# Altium PCB Cubit3_main_pcb.PcbDoc (part 2 of 4)
Units mm, origin at the board's own origin, x right, y up, seen from the top; angles counter-clockwise.
Board outline 58.47 x 70 mm, 4 copper layers (Top Layer, Layer 2, Layer 3, Bottom Layer), stack 0.602 mm thick; 134 components, 100 nets, 451 pads, 313 vias.
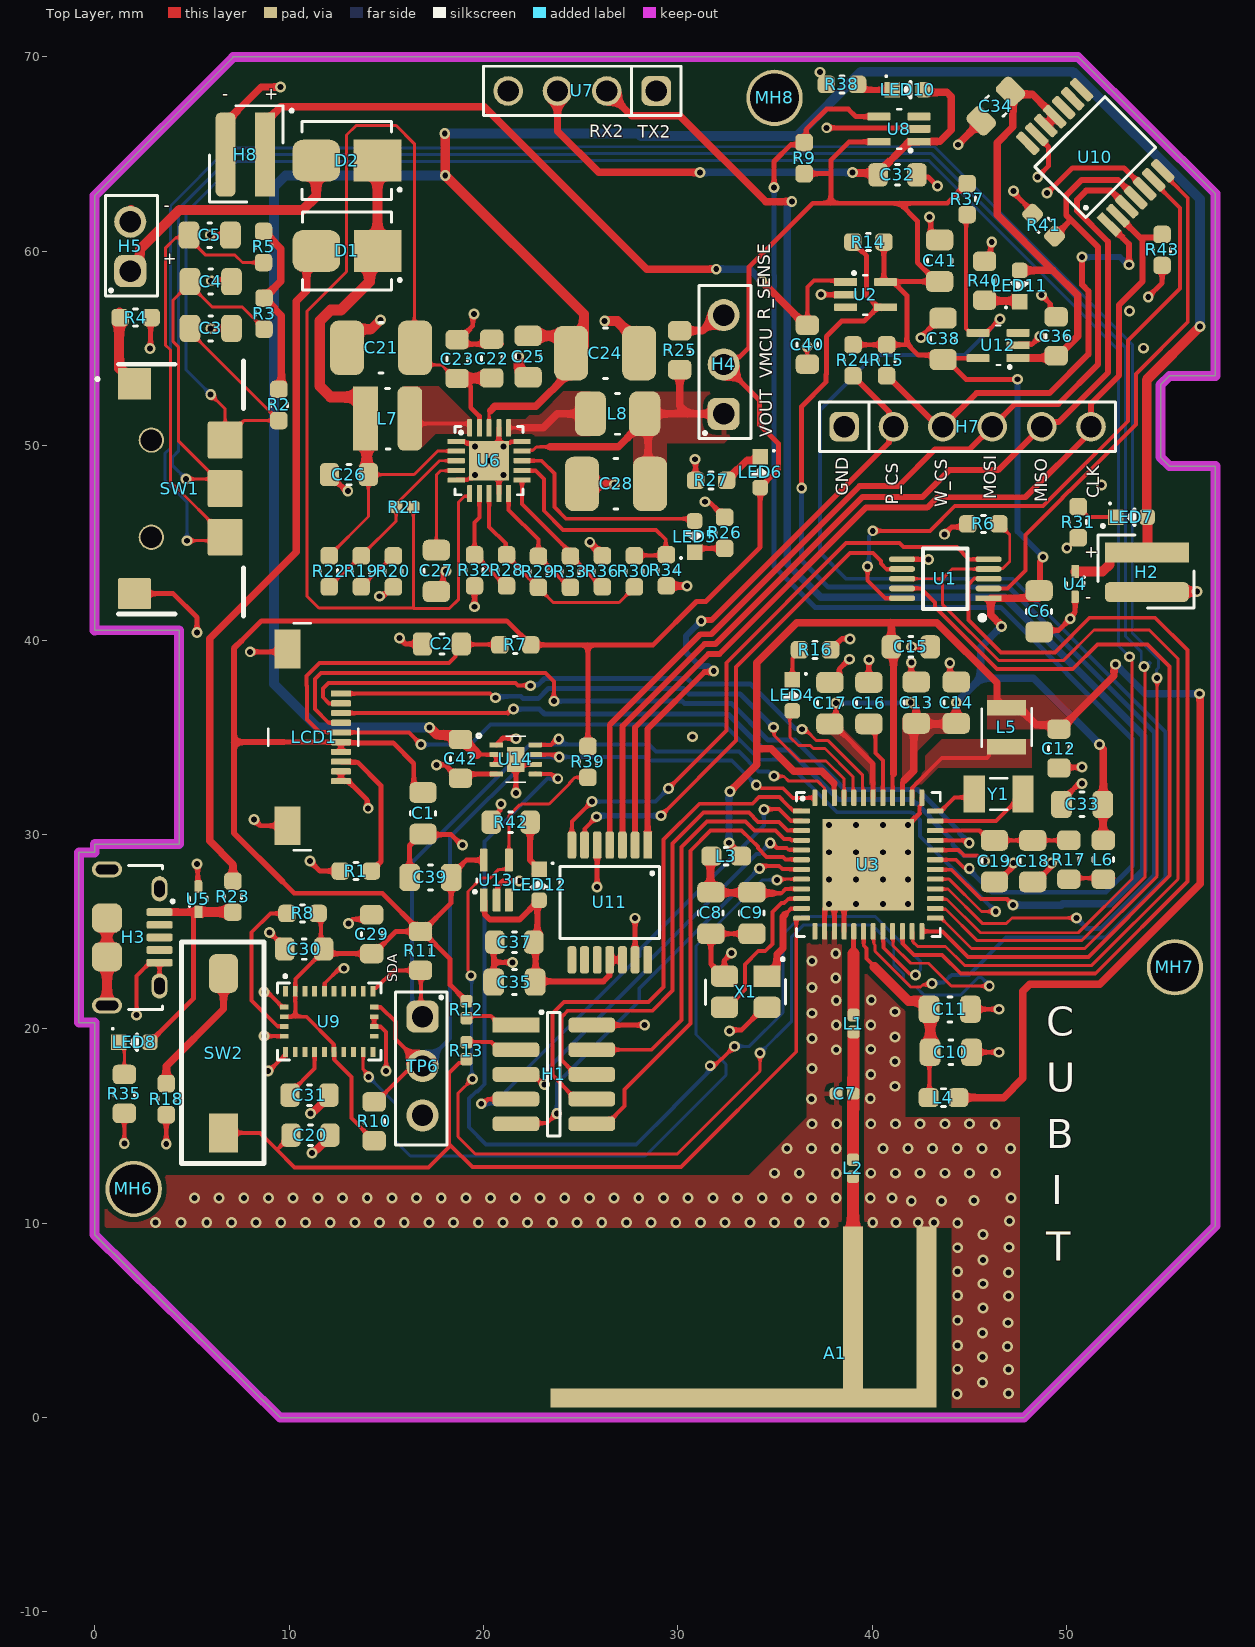
[diagram p0: Top Layer view]

## Part data (continued)
L5: library part DFE252012P-4R7M=P2, "4.7uH, 20%, 1 Element, Metal Alloy-Core, SMD, 1008", DC Resistance (DCR)=200mR, Inductance-Nom (L)=4.7uH, Inductor Type="GENERAL PURPOSE INDUCTOR", Manufacturer=Murata, Manufacturer Part Number=DFE252012P-4R7M=P2, Max Operating Temperature=125°C, Min Operating Temperature=-40°C, Rated Current-Max=1.4A, Test Frequency=1MHz, Tolerance=20%, Category="Fixed Inductors", ComponentLink1Description=https://psearch.en.murata.com:443/inductor/product/DFE252012P-4R7M_.pdf?src-supplier=IHS+Markit, ComponentLink1URL=https://psearch.en.murata.com:443/inductor/product/DFE252012P-4R7M_.pdf?src-supplier=IHS+Markit, ComponentLink2Description=http://www.farnell.com/datasheets/2550138.pdf?src-supplier=Farnell, ComponentLink2URL=http://www.farnell.com/datasheets/2550138.pdf?src-supplier=Farnell, ComponentLink3Description=http://www.murata.com/~/media/webrenewal/products/inductor/chip/tokoproducts/wirewoundmetalalloychiptype/m_dfe252012p.ashx?src-supplier=Digikey, ComponentLink3URL=http://www.murata.com/~/media/webrenewal/products/inductor/chip/tokoproducts/wirewoundmetalalloychiptype/m_dfe252012p.ashx?src-supplier=Digikey, ComponentLink4Description=https://www.murata.com/~/media/webrenewal/products/inductor/chip/tokoproducts/wirewoundmetalalloychiptype/m_dfe252012p.ashx?src-supplier=Digikey, ComponentLink4URL=https://www.murata.com/~/media/webrenewal/products/inductor/chip/tokoproducts/wirewoundmetalalloychiptype/m_dfe252012p.ashx?src-supplier=Digikey, ComponentLink5Description=http://www.toko.co.jp/products/pdf/inductors/dfe252012p.pdf?src-supplier=Avnet, ComponentLink5URL=http://www.toko.co.jp/products/pdf/inductors/dfe252012p.pdf?src-supplier=Avnet, ComponentLink6Description=http://www.farnell.com/datasheets/2550138.pdf?src-supplier=Newark, ComponentLink6URL=http://www.farnell.com/datasheets/2550138.pdf?src-supplier=Newark, Core Material=Metal, Number of Functions=1, Number of Pins=2, Pricing 1="1=0.28, 10=0.228, 25=0.21, 50=0.1926, 100=0.1698, 250=0.1646, 500=0.14708, 1000=0.11907 (USD)", Reach SVHC Compliant=Yes, RoHS=Yes, RoHS Compliant=Yes, Shape/Size Description="RECTANGULAR PACKAGE", Shielding=Shielded, Stock 1=44321, Supplier 1=Digikey, Surface Mount=Yes, Terminal Placement="Dual Ended", Termination=Wraparound
L6: library part 74279266, "Ferrite Beads WE-CBF 0603 SMD Bead 100MHz 1000Ohm 200mA", Case Code (Imperial)=0603, Case Code (Metric)=1608, Case/Package=SMD/SMT, Current Rating=200mA, DC Resistance (DCR)=600mR, Inductance=1.8nH, Manufacturer="Wurth Electronics", Max Operating Temperature=125°C, Min Operating Temperature=-55°C, Test Frequency=100MHz, Tolerance=25%, Category="Ferrite Beads and Chips", ComponentLink1Description=https://datasheet.ciiva.com/23763/74279266-23763009.pdf?src-supplier=Newark, ComponentLink1URL=https://datasheet.ciiva.com/23763/74279266-23763009.pdf?src-supplier=Newark, ComponentLink2Description=https://datasheet.ciiva.com/11799/0900766b801ef1d0-11799352.pdf?src-supplier=RSComponents, ComponentLink2URL=https://datasheet.ciiva.com/11799/0900766b801ef1d0-11799352.pdf?src-supplier=RSComponents, ComponentLink3Description=https://datasheet.ciiva.com/12395/74279266-221135-12395453.pdf?src-supplier=Mouser, ComponentLink3URL=https://datasheet.ciiva.com/12395/74279266-221135-12395453.pdf?src-supplier=Mouser, ComponentLink4Description=https://datasheet.ciiva.com/14971/74279266-14971192.pdf?src-supplier=Digi-Key, ComponentLink4URL=https://datasheet.ciiva.com/14971/74279266-14971192.pdf?src-supplier=Digi-Key, ComponentLink5Description=https://datasheet.ciiva.com/14634/0900766b801ef1d0-14634816.pdf?src-supplier=Allied+Electronics, ComponentLink5URL=https://datasheet.ciiva.com/14634/0900766b801ef1d0-14634816.pdf?src-supplier=Allied+Electronics, ComponentLink6Description=https://datasheet.ciiva.com/1466/1705901-1466509.pdf?src-supplier=Element14, ComponentLink6URL=https://datasheet.ciiva.com/1466/1705901-1466509.pdf?src-supplier=Element14, ComponentLink7Description=https://datasheet.ciiva.com/22711/1705901-22711422.pdf?src-supplier=Element14, ComponentLink7URL=https://datasheet.ciiva.com/22711/1705901-22711422.pdf?src-supplier=Element14, ComponentLink8Description=https://datasheet.ciiva.com/48698/001087059-da-01-ml-we-cbf-smd-ferrit-74279266-de-en-48698427.pdf?src-supplier=Conrad, ComponentLink8URL=https://datasheet.ciiva.com/48698/001087059-da-01-ml-we-cbf-smd-ferrit-74279266-de-en-48698427.pdf?src-supplier=Conrad, Core Material=Ferrite, Depth=0.8mm, Height=0.8mm, Impedance=1kR, Lead Free="Lead Free", Length=1.6mm, Manufacturer Part Number=74279266, Max Current Rating=200mA, Max DC Current=200mA, Number of Lines=1, Packaging="Tape and Reel", Pricing 1="1=0.18000, 50=0.17400, 100=0.16000, 500=0.15300, 1000=0.14600, 2000=0.13900 (USD)", REACH SVHC=Unknown, RoHS=Yes, RoHS Compliant=Yes, Series=WE-CBF, Shielding=Unshielded, Supplier 1=Digi-Key, Termination=SMD/SMT, Width=0.8mm
L7: library part VLS3015CX-220M-1, "Inductor Power Shielded Wirewound 22uH 20% 1MHz Ferrite 0.87A 0.496Ohm DCR 1212 T/R", Manufacturer=TDK, Category="Fixed Inductors", Manufacturer Part Number=VLS3015CX-220M-1, Pricing 1="1=0.40000, 10=0.35400, 25=0.30960, 50=0.26540, 100=0.24320, 250=0.22112, 500=0.20784, 1000=0.15919 (USD)", RoHS=Yes, RoHS Compliant=Yes, Stock 1=1791, Supplier 1=Digi-Key
L8: library part 1239AS-H-100M=P2, "Inductor Power Shielded Multi-Layer 10uH 20% 1MHz Metal 0.85A 0.46Ohm DCR 1008 T/R", Case Code (Imperial)=1008, Case Code (Metric)=2520, Current Rating=1A, DC Resistance (DCR)=460mR, Inductance=10uH, Manufacturer=Murata, Manufacturer Part Number=1239AS-H-100M=P2, Max DC Current=850mA, Max Operating Temperature=85°C, Min Operating Temperature=-40°C, Resistor Type=Wirewound, Test Frequency=1MHz, Tolerance=20%, Case/Package=1008, Category="Fixed Inductors", ComponentLink1Description=http://www.farnell.com/datasheets/2339712.pdf?src-supplier=Farnell, ComponentLink1URL=http://www.farnell.com/datasheets/2339712.pdf?src-supplier=Farnell, ComponentLink2Description=http://www.toko.co.jp/products/pdf/inductors/dfe252012c.pdf?src-supplier=Avnet, ComponentLink2URL=http://www.toko.co.jp/products/pdf/inductors/dfe252012c.pdf?src-supplier=Avnet, ComponentLink3Description=http://www.farnell.com/datasheets/2339712.pdf?src-supplier=Newark, ComponentLink3URL=http://www.farnell.com/datasheets/2339712.pdf?src-supplier=Newark, ComponentLink4Description=https://www.murata.com/~/media/webrenewal/products/inductor/chip/tokoproducts/wirewoundmetalalloychiptype/m_dfe252012c.ashx?src-supplier=Digi-Key, ComponentLink4URL=https://www.murata.com/~/media/webrenewal/products/inductor/chip/tokoproducts/wirewoundmetalalloychiptype/m_dfe252012c.ashx?src-supplier=Digi-Key, Core Material=Ferrite,Metal, Depth=2mm, Height - Seated (Max)=0.047inch, Length=0.098inch, Mount="Surface Mount", Packaging="Tape and Reel", Pricing 1="1=0.39000, 10=0.34400, 25=0.30120, 50=0.25840, 100=0.23680, 250=0.21524, 500=0.20234, 1000=0.15498 (USD)", RoHS=Yes, RoHS Compliant=Yes, Shielding=Shielded, Stock 1=142733, Supplier 1=Digi-Key, Width=0.079inch
LCD1: "FFC/FPC Connector, 10 Contact(s), 1 Row(s), Female, Right Angle, Surface Mount Terminal", Flammability Rating="UL94 V-0", Manufacturer=Molex, Manufacturer Part Number=505110-1092, Category="FFC / FPC", ComponentLink1Description=https://datasheet.ciiva.com:443/pdfs/VipMasterIC/IC/MOLE/MOLE-S-A0009009131/MOLE-S-A0009009131-1.pdf?src-supplier=IHS+Markit, ComponentLink1URL=https://datasheet.ciiva.com:443/pdfs/VipMasterIC/IC/MOLE/MOLE-S-A0009009131/MOLE-S-A0009009131-1.pdf?src-supplier=IHS+Markit, ComponentLink2Description=https://media.digikey.com/pdf/Data%20Sheets/Molex%20PDFs/FFC-FPC_Connectors.pdf?src-supplier=Digi-Key, ComponentLink2URL=https://media.digikey.com/pdf/Data%20Sheets/Molex%20PDFs/FFC-FPC_Connectors.pdf?src-supplier=Digi-Key, ComponentLink3Description=http://www.farnell.com/datasheets/2215713.pdf?src-supplier=Farnell, ComponentLink3URL=http://www.farnell.com/datasheets/2215713.pdf?src-supplier=Farnell, ComponentLink4Description=https://www.mouser.com/ds/2/276/5051101092_FFC_FPC_CONNECTORS-772849.pdf?src-supplier=Mouser, ComponentLink4URL=https://www.mouser.com/ds/2/276/5051101092_FFC_FPC_CONNECTORS-772849.pdf?src-supplier=Mouser, ComponentLink5Description=http://www.alliedelec.com/m/d/498d8ef60ec1840486550b3bb04c7a47.pdf?src-supplier=Allied+Electronics, ComponentLink5URL=http://www.alliedelec.com/m/d/498d8ef60ec1840486550b3bb04c7a47.pdf?src-supplier=Allied+Electronics, ComponentLink6Description=https://www.molex.com/datasheets/rohspdf/5051101092_rohs.pdf?src-supplier=Digi-Key, ComponentLink6URL=https://www.molex.com/datasheets/rohspdf/5051101092_rohs.pdf?src-supplier=Digi-Key, ComponentLink7Description=http://www.farnell.com/datasheets/2215713.pdf?src-supplier=Newark, ComponentLink7URL=http://www.farnell.com/datasheets/2215713.pdf?src-supplier=Newark, ComponentLink8Description=http://www.farnell.com/datasheets/2014276.pdf?src-supplier=Element14, ComponentLink8URL=http://www.farnell.com/datasheets/2014276.pdf?src-supplier=Element14, ComponentLink9Description=http://www.farnell.com/datasheets/2215713.pdf?src-supplier=Element14, ComponentLink9URL=http://www.farnell.com/datasheets/2215713.pdf?src-supplier=Element14, Connector Type="CARD EDGE CONNECTOR", Contact Finish - Mating="GOLD OVER NICKEL", Contact Finish - Termination="GOLD OVER NICKEL", Contact Gender=Female, Contact Material=Bronze, DIN Conformance=No, Filter Feature=No, IEC Conformance=No, JESD-609 Code=e4, Mating Information=NO, MIL Conformance=No, Mixed Contacts=No, Mount=Board, Mounting Style="RIGHT ANGLE", Number of Contacts=10, Number of Rows Loaded=1, Option="General Purpose", Pricing 1="1=0.77, 10=0.653, 100=0.5078, 1000=0.39896 (USD)", Reach SVHC Compliant=Yes, RoHS=Yes, RoHS Compliant=Yes, Stock 1=86494, Supplier 1=Digi-Key, Terminal Pitch=0.5mm, Termination=SMD/SMT
LED4 LED10: library part QBLP601-AG1, "Led Green Clear 0603 SMD", Manufacturer=QT-Brightek, Manufacturer Part Number=QBLP601-AG1, Pricing 1="1=0.35000, 10=0.19000, 100=0.08820, 500=0.08140, 1000=0.06377, 2000=0.06242 (USD)", RoHS=No, Stock 1=5990, Supplier 1=Digi-Key
LED5 LED6 LED7 LED8: "LED Low-Power Uni-Color Red 630nm 2V 2-Pin Chip 0603(1608Metric) T/R", Case Code (Imperial)=0603, Case Code (Metric)=1608, Color=Red, Forward Current=30mA, Forward Voltage=2V, Manufacturer="Wurth Electronics", Max Operating Temperature=85°C, Min Operating Temperature=-40°C, Package Quantity=1, Test Current=20mA, Case/Package=0603, Category=LEDs, ComponentLink1Description=https://datasheet.ciiva.com/29563/150060rs75000-29563040.pdf?src-supplier=Digi-Key, ComponentLink1URL=https://datasheet.ciiva.com/29563/150060rs75000-29563040.pdf?src-supplier=Digi-Key, ComponentLink2Description=https://datasheet.ciiva.com/29279/759428-da-01-en-chipled-0603-w-kl-rot-150060rs75000-29279196.pdf?src-supplier=Conrad, ComponentLink2URL=https://datasheet.ciiva.com/29279/759428-da-01-en-chipled-0603-w-kl-rot-150060rs75000-29279196.pdf?src-supplier=Conrad, Dominant Wavelength=625nm, Height=0.7mm, Length=1.6mm, Lens Style=Clear,Rectangular, Luminous Intensity=250mcd, Manufacturer Part Number=150060RS75000, Mount="Surface Mount", Packaging="Cut Tape", Pricing 1="1=0.15000, 50=0.13800, 100=0.11800, 500=0.10200, 1000=0.09900 (USD)", REACH SVHC=Unknown, RoHS=Yes, RoHS Compliant=Yes, Stock 1=39, Supplier 1=Digi-Key, Viewing Angle=140°, Wavelength=625nm, Width=0.8mm
LED11 LED12: "Led, Blue, 470 Nm, 3.2 V, 30 Ma, 145 Mcd Rohs Compliant: Yes", Case Code (Imperial)=0603, Case Code (Metric)=1608, Color=Blue, Forward Current=30mA, Forward Voltage=3.2V, Manufacturer="Wurth Electronics", Max Operating Temperature=85°C, Min Operating Temperature=-40°C, Package Quantity=4000, Test Current=20mA, Case/Package=0603, Category=LEDs, ComponentLink1Description=https://datasheet.ciiva.com/29563/150060bs75000-29563034.pdf?src-supplier=Digi-Key, ComponentLink1URL=https://datasheet.ciiva.com/29563/150060bs75000-29563034.pdf?src-supplier=Digi-Key, ComponentLink2Description=https://datasheet.ciiva.com/29279/759426-da-01-en-chipled-0603-w-kl-blau-150060bs75000-29279193.pdf?src-supplier=Conrad, ComponentLink2URL=https://datasheet.ciiva.com/29279/759426-da-01-en-chipled-0603-w-kl-blau-150060bs75000-29279193.pdf?src-supplier=Conrad, ComponentLink3Description=https://datasheet.ciiva.com/29563/150060bs75000-29563036.pdf?src-supplier=Digi-Key, ComponentLink3URL=https://datasheet.ciiva.com/29563/150060bs75000-29563036.pdf?src-supplier=Digi-Key, ComponentLink4Description=https://datasheet.ciiva.com/29563/150060bs75000-29563035.pdf?src-supplier=Digi-Key, ComponentLink4URL=https://datasheet.ciiva.com/29563/150060bs75000-29563035.pdf?src-supplier=Digi-Key, ComponentLink5Description=https://datasheet.ciiva.com/22656/1911343-22656939.pdf?src-supplier=Element14, ComponentLink5URL=https://datasheet.ciiva.com/22656/1911343-22656939.pdf?src-supplier=Element14, ComponentLink6Description=https://datasheet.ciiva.com/48430/150060bs75000-eng-tds-48430039.pdf?src-supplier=Distrelec, ComponentLink6URL=https://datasheet.ciiva.com/48430/150060bs75000-eng-tds-48430039.pdf?src-supplier=Distrelec, Dominant Wavelength=470nm, Height=0.7mm, Length=1.6mm, Lens Style=Clear,Rectangular, Luminous Intensity=145mcd, Manufacturer Part Number=150060BS75000, Mount="Surface Mount", Packaging="Cut Tape", Pricing 1="1=0.16000, 50=0.15000, 100=0.12900, 500=0.11200 (USD)", REACH SVHC=Unknown, RoHS=Yes, RoHS Compliant=Yes, Stock 1=351, Supplier 1=Digi-Key, Viewing Angle=140°, Wavelength=470nm, Width=0.8mm
MH6 MH7 MH8: library part Mechanical_Hole
R1 R7 R8 R9 R14 R15 R24 R37 R39 R41 R43: library part RMCF0603FT10K0, "Res 10K Ohm 1% 1/10W ±100ppm/°C Molded SMD SMD Paper T/R", Case Code (Imperial)=0603, Case Code (Metric)=1608, Manufacturer="Stackpole Electronics", Max Operating Temperature=155°C, Max Power Dissipation=100mW, Min Operating Temperature=-55°C, Resistance=10kR, Resistor Type="Thick Film", Temperature Coefficient=100ppm/°C, Tolerance=1%, Case/Package=0603, Category="Chip SMD Resistors", ComponentLink1Description=http://components.arrow.com/part/dataview/43747082S6756917N1174?src-supplier=Arrow+Electronics, ComponentLink1URL=http://components.arrow.com/part/dataview/43747082S6756917N1174?src-supplier=Arrow+Electronics, ComponentLink2Description=https://www.seielect.com/catalog/SEI-RMCF_RMCP.pdf?src-supplier=Avnet, ComponentLink2URL=https://www.seielect.com/catalog/SEI-RMCF_RMCP.pdf?src-supplier=Avnet, ComponentLink3Description=http://www.seielect.com/catalog/sei-rmc.pdf?src-supplier=Future+Electronics, ComponentLink3URL=http://www.seielect.com/catalog/sei-rmc.pdf?src-supplier=Future+Electronics, ComponentLink4Description=https://www.verical.com/server-webapp/html/getDatasheet?partID=360913&src-supplier=Verical, ComponentLink4URL=https://www.verical.com/server-webapp/html/getDatasheet?partID=360913&src-supplier=Verical, ComponentLink5Description=https://www.seielect.com/catalog/sei-rmcf_rmcp.pdf?src-supplier=Digi-Key, ComponentLink5URL=https://www.seielect.com/catalog/sei-rmcf_rmcp.pdf?src-supplier=Digi-Key, Construction=Rectangular, Contact Plating=Tin,Matte, Depth=0.8mm, Features="Automotive AEC-Q200", Height=0.022inch, Lead Free="Lead Free", Length=1.55mm, Manufacturer Part Number=RMCF0603FT10K0, Military Standard=Not, Mount="Surface Mount", Number of Terminations=2, Packaging="Tape and Reel", Power Rating=100mW, Pricing 1="5000=0.00218 (USD)", Radiation Hardening=No, RoHS=Yes, RoHS Compliant=Yes, Series=RMCF, Size Code=0603, Stock 1=15114443, Supplier 1=Digi-Key, Width=0.031inch
R2 R3 R5 R6: library part RMCF0603FT1M00, "Res 1M Ohm 1% 1/10W ±100ppm/°C Molded SMD Paper T/R", Case Code (Imperial)=0603, Case Code (Metric)=1608, Manufacturer="Stackpole Electronics", Max Operating Temperature=155°C, Max Power Dissipation=100mW, Min Operating Temperature=-55°C, Resistance=1MR, Resistor Type="Thick Film", Temperature Coefficient=100ppm/°C, Tolerance=1%, Working Voltage=75V, Case/Package=0603, Category="Chip SMD Resistors", ComponentLink1Description=https://datasheet.ciiva.com/15193/getdatasheetpartid-363151-15193451.pdf?src-supplier=Verical, ComponentLink1URL=https://datasheet.ciiva.com/15193/getdatasheetpartid-363151-15193451.pdf?src-supplier=Verical, Construction=Rectangular, Contact Plating=Tin,Matte, Depth=0.8mm, Features="Automotive AEC-Q200", Height=0.022inch, Lead Free="Lead Free", Length=1.55mm, Manufacturer Part Number=RMCF0603FT1M00, Military Standard=Not, Mount="Surface Mount", Number of Terminations=2, Packaging="Tape and Reel", Power Rating=100mW, Pricing 1="1=0.10000, 10=0.01700, 100=0.00680, 1000=0.00305, 2500=0.00264 (USD)", Radiation Hardening=No, RoHS=Yes, RoHS Compliant=Yes, Series=RMCF, Stock 1=2136203, Supplier 1=Digi-Key, Technology="THICK FILM", Width=0.031inch
R4 R18: library part RMCF0603FT100R, "Res 100 Ohm 1% 1/10W ±100ppm/°C Molded SMD SMD Paper T/R", Case Code (Imperial)=0603, Case Code (Metric)=1608, Manufacturer="Stackpole Electronics", Max Operating Temperature=155°C, Max Power Dissipation=100mW, Min Operating Temperature=-55°C, Resistance=100R, Resistor Type="Thick Film", Temperature Coefficient=100ppm/°C, Tolerance=1%, Case/Package=0603, Category="Chip SMD Resistors", ComponentLink1Description=https://datasheet.ciiva.com/15215/getdatasheetpartid-360413-15215981.pdf?src-supplier=Verical, ComponentLink1URL=https://datasheet.ciiva.com/15215/getdatasheetpartid-360413-15215981.pdf?src-supplier=Verical, Construction=Rectangular, Contact Plating=Tin,Matte, Depth=0.8mm, Features="Automotive AEC-Q200", Height=0.022inch, Lead Free="Lead Free", Length=1.55mm, Manufacturer Part Number=RMCF0603FT100R, Military Standard=Not, Mount="Surface Mount", Number of Terminations=2, Packaging="Tape and Reel", Power Rating=100mW, Pricing 1="1=0.10000, 10=0.01700, 100=0.00680, 1000=0.00305, 2500=0.00264 (USD)", Radiation Hardening=No, RoHS=Yes, RoHS Compliant=Yes, Series=RMCF, Size Code=0603, Supplier 1=Digi-Key, Width=0.031inch
R10 R11: library part AF0603FR-074K7L, "Res Thick Film 0603 4.7K Ohm 1% 1/10W ±100ppm/°C Molded SMD Paper T/R", Case Code (Imperial)=0603, Case Code (Metric)=1608, Manufacturer=Yageo, Max Operating Temperature=155°C, Max Power Dissipation=100mW, Min Operating Temperature=-55°C, Package Quantity=5000, Resistance=4.7kR, Resistor Type="Thick Film", Temperature Coefficient=100ppm/°C, Tolerance=1%, Voltage Rating=75V, Case/Package=0603, Category="Chip SMD Resistors", ComponentLink1Description=http://www.mouser.com/ds/2/447/PYu-AF_51_RoHS_L_5-1085711.pdf?src-supplier=Mouser, ComponentLink1URL=http://www.mouser.com/ds/2/447/PYu-AF_51_RoHS_L_5-1085711.pdf?src-supplier=Mouser, ComponentLink2Description=http://www.yageo.com/documents/recent/PYu-AF_51_RoHS_L_5.pdf?src-supplier=Digi-Key, ComponentLink2URL=http://www.yageo.com/documents/recent/PYu-AF_51_RoHS_L_5.pdf?src-supplier=Digi-Key, Features="Moisture Resistant,Anti-Sulfur", Height=0.022inch, Length=0.063inch, Manufacturer Part Number=AF0603FR-074K7L, Number of Terminations=2, Packaging="Tape and Reel", Power Rating=100mW, Pricing 1="1=0.10000, 10=0.06100, 100=0.02470, 1000=0.01109, 2500=0.00963 (USD)", RoHS=Yes, RoHS Compliant=Yes, Stock 1=6660, Supplier 1=Digi-Key, Termination=SMD/SMT, Weight=7.1E-05oz, Width=0.031inch
R12 R13 R21: library part RC1005J000CS, "Res 0 Ohms ±5% 0.063 W 0402 Thick Film Surface Mount Chip Resistor", Case Code (Imperial)=0402, Case Code (Metric)=1005, Manufacturer=Samsung, Max Operating Temperature=125°C, Max Power Dissipation=63mW, Min Operating Temperature=-55°C, Resistance=0R, Resistor Type="Thick Film", Temperature Coefficient=200ppm/°C, Tolerance=5%, Voltage Rating (DC)=50V, Case/Package=0402, Category="Chip SMD Resistors", ComponentLink1Description=https://datasheet.ciiva.com/15196/getdatasheetpartid-499011-15196236.pdf?src-supplier=Verical, ComponentLink1URL=https://datasheet.ciiva.com/15196/getdatasheetpartid-499011-15196236.pdf?src-supplier=Verical, ComponentLink2Description=https://datasheet.ciiva.com/16449/rcseries-16449310.pdf?src-supplier=Future+Electronics, ComponentLink2URL=https://datasheet.ciiva.com/16449/rcseries-16449310.pdf?src-supplier=Future+Electronics, Construction=Rectangular, Contact Plating=Tin, Depth=0.5mm, Features="Moisture Resistant", Height=0.016inch, Lead Free="Lead Free", Length=1mm, Manufacturer Part Number=RC1005J000CS, Military Standard=Not, Mount="Surface Mount", Number of Terminations=2, Packaging="Tape and Reel", Power Rating=63mW, Pricing 1="1=0.10000, 10=0.04200, 25=0.03040, 50=0.02300, 100=0.01700, 250=0.01296, 500=0.01036, 1000=0.00763, 5000=0.00547 (USD)", Radiation Hardening=No, RoHS=Yes, RoHS Compliant=Yes, Series=RC, Size Code=0402, Stock 1=580, Supplier 1=Digi-Key, Width=0.02inch
R16 R26 R27 R31 R38: library part RMCF0603FT1K00, "Res 1K Ohm 1% 0.1W(1/10W) ±100ppm/C Pad SMD Automotive T/R", Case Code (Imperial)=0603, Case Code (Metric)=1608, Manufacturer="Stackpole Electronics", Max Operating Temperature=155°C, Max Power Dissipation=100mW, Min Operating Temperature=-55°C, Resistance=1kR, Resistor Type="Thick Film", Temperature Coefficient=100ppm/°C, Tolerance=1%, Case/Package=0603, Category="Chip SMD Resistors", ComponentLink1Description=https://www.seielect.com/catalog/sei-rmcf_rmcp.pdf?src-supplier=Digi-Key, ComponentLink1URL=https://www.seielect.com/catalog/sei-rmcf_rmcp.pdf?src-supplier=Digi-Key, ComponentLink2Description=https://www.seielect.com/catalog/SEI-RMCF_RMCP.pdf?src-supplier=Avnet, ComponentLink2URL=https://www.seielect.com/catalog/SEI-RMCF_RMCP.pdf?src-supplier=Avnet, ComponentLink3Description=https://www.seielect.com/catalog/SEI-Packaging.pdf?src-supplier=Avnet, ComponentLink3URL=https://www.seielect.com/catalog/SEI-Packaging.pdf?src-supplier=Avnet, ComponentLink4Description=https://www.seielect.com/catalog/SEI-Packaging.pdf?src-supplier=Arrow+Electronics, ComponentLink4URL=https://www.seielect.com/catalog/SEI-Packaging.pdf?src-supplier=Arrow+Electronics, ComponentLink5Description=https://www.seielect.com/catalog/SEI-RMCF_RMCP.pdf?src-supplier=Avnet+Asia, ComponentLink5URL=https://www.seielect.com/catalog/SEI-RMCF_RMCP.pdf?src-supplier=Avnet+Asia, ComponentLink6Description=http://www.seielect.com/Catalog/SEI-rmc.pdf?src-supplier=Future+Electronics, ComponentLink6URL=http://www.seielect.com/Catalog/SEI-rmc.pdf?src-supplier=Future+Electronics, ComponentLink7Description=https://www.seielect.com/catalog/SEI-Packaging.pdf?src-supplier=Verical, ComponentLink7URL=https://www.seielect.com/catalog/SEI-Packaging.pdf?src-supplier=Verical, ComponentLink8Description=https://www.seielect.com/catalog/SEI-Packaging.pdf?src-supplier=Quest, ComponentLink8URL=https://www.seielect.com/catalog/SEI-Packaging.pdf?src-supplier=Quest, Construction=Rectangular, Contact Plating=Tin,Matte, Depth=0.8mm, Features="Automotive AEC-Q200", Height=0.022inch, Lead Free="Lead Free", Length=1.55mm, Manufacturer Part Number=RMCF0603FT1K00, Military Standard=Not, Mount="Surface Mount", Number of Terminations=2, Packaging="Tape and Reel", Power Rating=100mW, Pricing 1="1=0.10000, 10=0.01700, 100=0.00680, 1000=0.00305, 2500=0.00264 (USD)", Radiation Hardening=No, RoHS=Yes, RoHS Compliant=Yes, Series=RMCF, Size Code=0603, Supplier 1=Digi-Key, Width=0.031inch
R17 R25: library part RC0603FR-101RL, "Res 1 Ohm 1% 1/10W ±200ppm/°C Molded SMD SMD Paper T/R", Case Code (Imperial)=0603, Case Code (Metric)=1608, Manufacturer=Yageo, Max Operating Temperature=155°C, Min Operating Temperature=-55°C, Power Rating=100mW, Resistance=1R, Resistor Type="Thick Film", Temperature Coefficient=200ppm/°C, Tolerance=1%, Voltage Rating=50V, Case/Package=0603, Category="Chip SMD Resistors", ComponentLink1Description=http://www.mouser.com/ds/2/447/RC0603-272842.pdf?src-supplier=Mouser, ComponentLink1URL=http://www.mouser.com/ds/2/447/RC0603-272842.pdf?src-supplier=Mouser, ComponentLink2Description=http://components.arrow.com/part/dataview/0323_03914755?src-supplier=Arrow+Europe, ComponentLink2URL=http://components.arrow.com/part/dataview/0323_03914755?src-supplier=Arrow+Europe, ComponentLink3Description=http://www.yageo.com/documents/recent/PYu-RC_Group_51_RoHS_L_2.pdf?src-supplier=Avnet, ComponentLink3URL=http://www.yageo.com/documents/recent/PYu-RC_Group_51_RoHS_L_2.pdf?src-supplier=Avnet, ComponentLink4Description=http://www.yageo.com/documents/recent/PYu-RC0603_51_RoHS_L_5.pdf?src-supplier=Avnet+Europe, ComponentLink4URL=http://www.yageo.com/documents/recent/PYu-RC0603_51_RoHS_L_5.pdf?src-supplier=Avnet+Europe, ComponentLink5Description=https://datasheet.octopart.com/RC0603FR-101RL-Yageo-datasheet-8328172.pdf?src-supplier=_legacy+Avnet, ComponentLink5URL=https://datasheet.octopart.com/RC0603FR-101RL-Yageo-datasheet-8328172.pdf?src-supplier=_legacy+Avnet, ComponentLink6Description=https://datasheet.octopart.com/RC0603FR-101RL-Yageo-datasheet-73766026.pdf, ComponentLink6URL=https://datasheet.octopart.com/RC0603FR-101RL-Yageo-datasheet-73766026.pdf, Construction=Rectangular, Contact Plating=Tin, Depth=0.8mm, Height=0.45mm, Length=1.6mm, Manufacturer Part Number=RC0603FR-101RL, Military Standard=Not, Packaging="Tape and Reel", Pricing 1="1=0.10000, 10=0.04800, 100=0.01940, 1000=0.00872, 2500=0.00756, 5000=0.00625 (USD)", Radiation Hardening=No, RoHS Compliant=Yes, Series=RC, Stock 1=19075, Supplier 1=Digi-Key, Termination=SMD/SMT, Width=0.8mm
R19: library part RMCF0603FT10M0, "Res 10M Ohm 1% 1/10W ±200ppm/°C Molded SMD SMD Paper T/R", Case Code (Imperial)=0603, Case Code (Metric)=1608, Manufacturer="Stackpole Electronics", Max Operating Temperature=155°C, Max Power Dissipation=100mW, Min Operating Temperature=-55°C, Resistance=10MR, Resistor Type="Thick Film", Temperature Coefficient=200ppm/°C, Tolerance=1%, Case/Package=0603, Category="Chip SMD Resistors", ComponentLink1Description=http://components.arrow.com/part/dataview/47093497S7925112N1174?src-supplier=Arrow+Electronics, ComponentLink1URL=http://components.arrow.com/part/dataview/47093497S7925112N1174?src-supplier=Arrow+Electronics, ComponentLink2Description=https://www.seielect.com/catalog/SEI-RMCF_RMCP.pdf?src-supplier=Avnet, ComponentLink2URL=https://www.seielect.com/catalog/SEI-RMCF_RMCP.pdf?src-supplier=Avnet, ComponentLink3Description=https://www.verical.com/server-webapp/html/getDatasheet?partID=691637&src-supplier=Verical, ComponentLink3URL=https://www.verical.com/server-webapp/html/getDatasheet?partID=691637&src-supplier=Verical, ComponentLink4Description=https://www.seielect.com/catalog/SEI-Packaging.pdf?src-supplier=Digi-Key, ComponentLink4URL=https://www.seielect.com/catalog/SEI-Packaging.pdf?src-supplier=Digi-Key, Construction=Rectangular, Contact Plating=Tin,Matte, Depth=0.8mm, Features="Automotive AEC-Q200", Height=0.022inch, Lead Free="Lead Free", Length=0.061inch, Manufacturer Part Number=RMCF0603FT10M0, Military Standard=Not, Mount="Surface Mount", Number of Terminations=2, Packaging="Tape and Reel", Pricing 1="1=0.10000, 10=0.02500, 100=0.01020, 1000=0.00457, 2500=0.00397 (USD)", Radiation Hardening=No, RoHS=Yes, RoHS Compliant=Yes, Series=RMCF, Stock 1=127846, Supplier 1=Digi-Key, Width=0.031inch
R20: library part RMCF0603FT2M00, "RES 2M OHM 1% 1/10W 0603", Case Code (Imperial)=0603, Case Code (Metric)=1608, Manufacturer="Stackpole Electronics", Max Operating Temperature=155°C, Max Power Dissipation=100mW, Min Operating Temperature=-55°C, Resistance=2MR, Resistor Type="Thick Film", Temperature Coefficient=200ppm/°C, Tolerance=1%, Case/Package=0603, Category="Chip SMD Resistors", ComponentLink1Description=https://datasheet.ciiva.com/26875/getdatasheetpartid-719436-26875364.pdf?src-supplier=Verical, ComponentLink1URL=https://datasheet.ciiva.com/26875/getdatasheetpartid-719436-26875364.pdf?src-supplier=Verical, Construction=Rectangular, Contact Plating=Tin,Matte, Depth=0.8mm, Features="Automotive AEC-Q200", Height=0.022inch, Length=0.061inch, Manufacturer Part Number=RMCF0603FT2M00, Military Standard=Not, Mount="Surface Mount", Number of Terminations=2, Packaging="Tape and Reel", Pricing 1="1=0.10000, 10=0.02500, 100=0.01020, 1000=0.00457, 2500=0.00397 (USD)", Radiation Hardening=No, RoHS=Yes, RoHS Compliant=Yes, Series=RMCF, Stock 1=2082, Supplier 1=Digi-Key, Width=0.031inch
R22: library part RMCF0603FT7M87, "Res 7.87M Ohm 1% 1/10W ±200ppm/°C Molded SMD SMD Paper T/R", Case/Package=0603, Manufacturer="Stackpole Electronics", Max Operating Temperature=155°C, Max Power Dissipation=100mW, Min Operating Temperature=-55°C, Resistance=7.87MR, Resistor Type="Thick Film", Temperature Coefficient=200ppm/°C, Tolerance=1%, Category="Chip SMD Resistors", ComponentLink1Description=https://www.seielect.com/Catalog/SEI-RMCF_RMCP.pdf?src-supplier=Digi-Key, ComponentLink1URL=https://www.seielect.com/Catalog/SEI-RMCF_RMCP.pdf?src-supplier=Digi-Key, ComponentLink2Description=https://www.seielect.com/catalog/SEI-RMCF_RMCP.pdf?src-supplier=Avnet, ComponentLink2URL=https://www.seielect.com/catalog/SEI-RMCF_RMCP.pdf?src-supplier=Avnet, Contact Plating=Tin,Matte, Features="Automotive AEC-Q200", Height=0.022inch, Length=0.061inch, Manufacturer Part Number=RMCF0603FT7M87, Mount="Surface Mount", Number of Terminations=2, Packaging="Tape and Reel", Pricing 1="1=0.10000, 10=0.02500, 100=0.01020, 1000=0.00457, 2500=0.00397 (USD)", Radiation Hardening=No, RoHS=Yes, RoHS Compliant=Yes, Series=RMCF, Stock 1=4289, Supplier 1=Digi-Key, Width=0.031inch
R23: library part KTR03EZPF20R0, "Res High Voltage 0603 20 Ohm 1/10W 1% SMD", Case Code (Imperial)=0603, Case Code (Metric)=1608, Manufacturer=Rohm, Max Operating Temperature=155°C, Max Power Dissipation=100mW, Min Operating Temperature=-55°C, Package Quantity=5000, Resistance=20R, Resistor Type="Thick Film", Temperature Coefficient=100ppm/°C, Tolerance=1%, Case/Package=0603, Category="Chip SMD Resistors", ComponentLink1Description=https://datasheet.ciiva.com/14932/ktr-14932075.pdf?src-supplier=Digi-Key, ComponentLink1URL=https://datasheet.ciiva.com/14932/ktr-14932075.pdf?src-supplier=Digi-Key, ComponentLink2Description=https://datasheet.ciiva.com/14925/ktr-14925734.pdf?src-supplier=Digi-Key, ComponentLink2URL=https://datasheet.ciiva.com/14925/ktr-14925734.pdf?src-supplier=Digi-Key, Features="Automotive AEC-Q200", Height=0.022inch, Length=0.063inch, Manufacturer Part Number=KTR03EZPF20R0, Number of Terminations=2, Packaging="Tape and Reel", Pricing 1="1=0.17000, 10=0.14800, 100=0.05690, 1000=0.02505, 2500=0.02163 (USD)", RoHS=Yes, RoHS Compliant=Yes, Series=KTR, Stock 1=3395, Supplier 1=Digi-Key, Width=0.031inch
R28 R33: library part RMCF0603FT7M32, "Res 7.32M Ohm 1% 1/10W ±200ppm/°C Molded SMD SMD Paper T/R", Case/Package=0603, Manufacturer="Stackpole Electronics", Max Operating Temperature=155°C, Min Operating Temperature=-55°C, Resistance=7.32MR, Resistor Type="Thick Film", Temperature Coefficient=200ppm/°C, Tolerance=1%, Category="Chip SMD Resistors", ComponentLink1Description=https://www.seielect.com/catalog/SEI-RMCF_RMCP.pdf?src-supplier=Avnet, ComponentLink1URL=https://www.seielect.com/catalog/SEI-RMCF_RMCP.pdf?src-supplier=Avnet, ComponentLink2Description=https://www.seielect.com/catalog/sei-rmcf_rmcp.pdf?src-supplier=Digi-Key, ComponentLink2URL=https://www.seielect.com/catalog/sei-rmcf_rmcp.pdf?src-supplier=Digi-Key, Contact Plating=Tin,Matte, Manufacturer Part Number=RMCF0603FT7M32, Mount="Surface Mount", Packaging="Tape and Reel", Pricing 1="1=0.10000, 10=0.02500, 100=0.01020, 1000=0.00457, 2500=0.00397 (USD)", Radiation Hardening=No, RoHS=Yes, RoHS Compliant=Yes, Stock 1=10385, Supplier 1=Digi-Key
R29: library part RMCF0603FT1M43, "Res 1.43M Ohm 1% 1/10W ±200ppm/°C Molded SMD SMD Paper T/R", Case/Package=0603, Manufacturer="Stackpole Electronics", Max Operating Temperature=155°C, Min Operating Temperature=-55°C, Resistance=1.43MR, Resistor Type="Thick Film", Temperature Coefficient=200ppm/°C, Tolerance=1%, Category="Chip SMD Resistors", ComponentLink1Description=http://components.arrow.com/part/dataview/40961582S8179483N1174?src-supplier=Arrow+Electronics, ComponentLink1URL=http://components.arrow.com/part/dataview/40961582S8179483N1174?src-supplier=Arrow+Electronics, ComponentLink2Description=https://www.seielect.com/catalog/sei-rmcf_rmcp.pdf?src-supplier=Digi-Key, ComponentLink2URL=https://www.seielect.com/catalog/sei-rmcf_rmcp.pdf?src-supplier=Digi-Key, ComponentLink3Description=https://www.seielect.com/catalog/SEI-RMCF_RMCP.pdf?src-supplier=Avnet, ComponentLink3URL=https://www.seielect.com/catalog/SEI-RMCF_RMCP.pdf?src-supplier=Avnet, Contact Plating=Tin,Matte, Manufacturer Part Number=RMCF0603FT1M43, Mount="Surface Mount", Packaging="Tape and Reel", Pricing 1="1=0.10000, 10=0.02500, 100=0.01020, 1000=0.00457, 2500=0.00397 (USD)", Radiation Hardening=No, RoHS=Yes, RoHS Compliant=Yes, Stock 1=5908, Supplier 1=Digi-Key
R30: library part RMCF0603FT8M06, "Res 8.06M Ohm 1% 1/10W ±200ppm/°C Molded SMD SMD Paper T/R", Case/Package=0603, Manufacturer="Stackpole Electronics", Max Operating Temperature=155°C, Min Operating Temperature=-55°C, Resistance=8.06MR, Resistor Type="Thick Film", Temperature Coefficient=200ppm/°C, Tolerance=1%, Category="Chip SMD Resistors", ComponentLink1Description=https://www.seielect.com/catalog/SEI-RMCF_RMCP.pdf?src-supplier=Avnet, ComponentLink1URL=https://www.seielect.com/catalog/SEI-RMCF_RMCP.pdf?src-supplier=Avnet, ComponentLink2Description=https://www.seielect.com/catalog/SEI-Packaging.pdf?src-supplier=Digi-Key, ComponentLink2URL=https://www.seielect.com/catalog/SEI-Packaging.pdf?src-supplier=Digi-Key, ComponentLink3Description=https://www.seielect.com/catalog/sei-rmcf_rmcp.pdf?src-supplier=Digi-Key, ComponentLink3URL=https://www.seielect.com/catalog/sei-rmcf_rmcp.pdf?src-supplier=Digi-Key, Contact Plating=Tin,Matte, Manufacturer Part Number=RMCF0603FT8M06, Mount="Surface Mount", Packaging="Tape and Reel", Pricing 1="1=0.10000, 10=0.02500, 100=0.01020, 1000=0.00457, 2500=0.00397 (USD)", Radiation Hardening=No, RoHS=Yes, RoHS Compliant=Yes, Stock 1=19888, Supplier 1=Digi-Key
R32: library part RMCF0603FT5M62, "Res 5.62M Ohm 1% 1/10W ±200ppm/°C Molded SMD SMD Paper T/R", Case/Package=0603, Manufacturer="Stackpole Electronics", Max Operating Temperature=155°C, Min Operating Temperature=-55°C, Resistance=5.62MR, Resistor Type="Thick Film", Temperature Coefficient=200ppm/°C, Tolerance=1%, Category="Chip SMD Resistors", ComponentLink1Description=https://www.seielect.com/catalog/sei-rmcf_rmcp.pdf?src-supplier=Digi-Key, ComponentLink1URL=https://www.seielect.com/catalog/sei-rmcf_rmcp.pdf?src-supplier=Digi-Key, ComponentLink2Description=https://www.seielect.com/catalog/SEI-RMCF_RMCP.pdf?src-supplier=Avnet, ComponentLink2URL=https://www.seielect.com/catalog/SEI-RMCF_RMCP.pdf?src-supplier=Avnet, Contact Plating=Tin,Matte, Manufacturer Part Number=RMCF0603FT5M62, Mount="Surface Mount", Packaging="Tape and Reel", Pricing 1="1=0.10000, 10=0.02500, 100=0.01020, 1000=0.00457, 2500=0.00397 (USD)", Radiation Hardening=No, RoHS=Yes, Stock 1=10522, Supplier 1=Digi-Key
R34: library part RMCF0603FT4M87, "Res 4.87M Ohm 1% 1/10W ±200ppm/°C Molded SMD SMD Paper T/R", Case/Package=0603, Manufacturer="Stackpole Electronics", Max Operating Temperature=155°C, Min Operating Temperature=-55°C, Resistance=4.87MR, Resistor Type="Thick Film", Temperature Coefficient=200ppm/°C, Tolerance=1%, Category="Chip SMD Resistors", ComponentLink1Description=https://www.seielect.com/catalog/sei-rmcf_rmcp.pdf?src-supplier=Digi-Key, ComponentLink1URL=https://www.seielect.com/catalog/sei-rmcf_rmcp.pdf?src-supplier=Digi-Key, ComponentLink2Description=https://www.seielect.com/catalog/SEI-RMCF_RMCP.pdf?src-supplier=Avnet, ComponentLink2URL=https://www.seielect.com/catalog/SEI-RMCF_RMCP.pdf?src-supplier=Avnet, Contact Plating=Tin,Matte, Manufacturer Part Number=RMCF0603FT4M87, Mount="Surface Mount", Packaging="Tape and Reel", Pricing 1="1=0.10000, 10=0.02500, 100=0.01020, 1000=0.00457, 2500=0.00397 (USD)", Radiation Hardening=No, RoHS=Yes, RoHS Compliant=Yes, Stock 1=5904, Supplier 1=Digi-Key
R35 R40 R42: library part RC0603FR-073KL, "Res 3000Ω ± 1.00% 0.1W ± 100ppm/℃ 0603", Case Code (Imperial)=0603, Case Code (Metric)=1608, Manufacturer=Yageo, Max Operating Temperature=155°C, Max Power Dissipation=100mW, Min Operating Temperature=-55°C, Resistance=3kR, Resistance Tolerance=1%, Resistor Type="Thick Film", Temperature Coefficient=100ppm/°C, Voltage Rating=50V, Case/Package=0603, Category="Chip SMD Resistors", ComponentLink1Description=http://www.farnell.com/datasheets/2167052.pdf?src-supplier=Farnell, ComponentLink1URL=http://www.farnell.com/datasheets/2167052.pdf?src-supplier=Farnell, ComponentLink2Description=http://www.mouser.com/ds/2/447/RC0603-272842.pdf?src-supplier=Mouser, ComponentLink2URL=http://www.mouser.com/ds/2/447/RC0603-272842.pdf?src-supplier=Mouser, ComponentLink3Description=http://components.arrow.com/part/dataview/0323_00200942?src-supplier=Arrow+Europe, ComponentLink3URL=http://components.arrow.com/part/dataview/0323_00200942?src-supplier=Arrow+Europe, ComponentLink4Description=https://www.verical.com/server-webapp/html/getDatasheet?partID=135099&src-supplier=Verical, ComponentLink4URL=https://www.verical.com/server-webapp/html/getDatasheet?partID=135099&src-supplier=Verical, ComponentLink5Description=http://www.farnell.com/datasheets/2167052.pdf?src-supplier=Element14, ComponentLink5URL=http://www.farnell.com/datasheets/2167052.pdf?src-supplier=Element14, ComponentLink6Description=http://www.yageo.com/documents/recent/PYu-RC_Group_51_RoHS_L_10.pdf?src-supplier=Digi-Key, ComponentLink6URL=http://www.yageo.com/documents/recent/PYu-RC_Group_51_RoHS_L_10.pdf?src-supplier=Digi-Key, ComponentLink7Description=http://www.yageo.com/documents/recent/PYu-RC_Group_51_RoHS_L_9.pdf?src-supplier=Digi-Key, ComponentLink7URL=http://www.yageo.com/documents/recent/PYu-RC_Group_51_RoHS_L_9.pdf?src-supplier=Digi-Key, ComponentLink8Description=http://www.farnell.com/datasheets/1868787.pdf?src-supplier=Newark, ComponentLink8URL=http://www.farnell.com/datasheets/1868787.pdf?src-supplier=Newark, ComponentLink9Description=http://www.yageo.com/documents/recent/PYu-RC0603_51_RoHS_L_7.pdf?src-supplier=Future+Electronics, ComponentLink9URL=http://www.yageo.com/documents/recent/PYu-RC0603_51_RoHS_L_7.pdf?src-supplier=Future+Electronics, Construction=Rectangular, Depth=0.8mm, Features="Moisture Resistant", Lead Free="Lead Free", Length=1.6mm, Manufacturer Part Number=RC0603FR-073KL, Military Standard=Not, Number of Pins=2, Number of Terminations=2, Packaging="Tape and Reel", Power Rating=100mW, Pricing 1="1=0.10000, 10=0.02400, 100=0.00970, 1000=0.00436, 2500=0.00378 (USD)", REACH SVHC="No SVHC", RoHS=Yes, RoHS Compliant=Yes, Series=RC, Size Code=0603, Stock 1=1079123, Supplier 1=Digi-Key, Termination=SMD/SMT, Tolerance=1%, Voltage Rating (DC)=50V, Width=800um
R36: library part RMCF0603FT4M42, "Res 4.42M Ohm 1% 1/10W ±200ppm/°C Molded SMD SMD Paper T/R", Case/Package=0603, Manufacturer="Stackpole Electronics", Max Operating Temperature=155°C, Min Operating Temperature=-55°C, Resistance=4.42MR, Resistor Type="Thick Film", Temperature Coefficient=200ppm/°C, Tolerance=1%, Category="Chip SMD Resistors", ComponentLink1Description=https://www.seielect.com/catalog/SEI-RMCF_RMCP.pdf?src-supplier=Avnet, ComponentLink1URL=https://www.seielect.com/catalog/SEI-RMCF_RMCP.pdf?src-supplier=Avnet, ComponentLink2Description=https://www.seielect.com/catalog/sei-rmcf_rmcp.pdf?src-supplier=Digi-Key, ComponentLink2URL=https://www.seielect.com/catalog/sei-rmcf_rmcp.pdf?src-supplier=Digi-Key, Contact Plating=Tin,Matte, Manufacturer Part Number=RMCF0603FT4M42, Mount="Surface Mount", Packaging="Tape and Reel", Pricing 1="1=0.10000, 10=0.02500, 100=0.01020, 1000=0.00457, 2500=0.00397 (USD)", Radiation Hardening=No, RoHS=Yes, RoHS Compliant=Yes, Stock 1=5226, Supplier 1=Digi-Key
SW1: "Surface Mount Navigation Switch", Manufacturer=SparkFun, ComponentLink1Description=https://cdn.sparkfun.com/datasheets/Components/Switches/LEVER8184.pdf?src-supplier=Digikey, ComponentLink1URL=https://cdn.sparkfun.com/datasheets/Components/Switches/LEVER8184.pdf?src-supplier=Digikey, Manufacturer Part Number=COM-08184, Pricing 1="1=1.6 (USD)", RoHS=No, Stock 1=109, Supplier 1=Digikey
SW2: library part PTS636SL43SMTRLFS, "Keypad Switch, 1 Switches, SPST, Momentary-tactile, 0.05A, 12VDC, 1.77N, Solder Terminal, Surface Mount-straight", Manufacturer="ITT C&K", Category="Tactile Switches", Manufacturer Part Number=PTS636SL43SMTRLFS, Pricing 1="1=0.19, 10=0.187, 25=0.1776, 100=0.1616, 250=0.15192, 500=0.13898 (USD)", RoHS=No, RoHS Compliant=Yes, Stock 1=11938, Supplier 1=Digikey
U1: library part TS3A24159DGSR, "SPDT, 2 Func, 2 Channel, PDSO10", Manufacturer="Texas Instruments", Max Operating Temperature=85°C, Min Operating Temperature=-40°C, On-state Resistance Match-Nom=20mR, On-state Resistance-Max (Ron)=450mR, Package Body Material=Plastic, Package Code=TSSOP, Package Equivalence Code=TSSOP10,.19,20, Package Shape=Square, Package Style="SMALL OUTLINE, THIN PROFILE, SHRINK PITCHMeter", Peak Reflow Temperature (Cel)=260°C, Power Supplies=1.8/3V, Signal Current-Max=100mA, Supply Voltage-Max (Vsup)=1.95V, Supply Voltage-Min (Vsup)=1.65V, Supply Voltage-Nom (Vsup)=1.8V, Temperature Grade=INDUSTRIAL, Analog IC - Other Type=SPDT, Category="Interface ICs", ComponentLink1Description=https://www.ti.com:443/lit/ds/symlink/ts3a24159.pdf?src-supplier=IHS+Markit, ComponentLink1URL=https://www.ti.com:443/lit/ds/symlink/ts3a24159.pdf?src-supplier=IHS+Markit, ComponentLink2Description=https://datasheet.ciiva.com/1671/ts3a24159-1671344.pdf?src-supplier=Digikey, ComponentLink2URL=https://datasheet.ciiva.com/1671/ts3a24159-1671344.pdf?src-supplier=Digikey, ComponentLink3Description=https://datasheet.ciiva.com/15127/getdatasheetpartid-225813-15127469.pdf?src-supplier=Verical, ComponentLink3URL=https://datasheet.ciiva.com/15127/getdatasheetpartid-225813-15127469.pdf?src-supplier=Verical, ComponentLink4Description=https://datasheet.ciiva.com/41461/001187304-da-01-en-ic-switch-dual-ts3a24159dgsr-msop-10-tid-41461680.pdf?src-supplier=Conrad, ComponentLink4URL=https://datasheet.ciiva.com/41461/001187304-da-01-en-ic-switch-dual-ts3a24159dgsr-msop-10-tid-41461680.pdf?src-supplier=Conrad, ComponentLink5Description=https://datasheet.ciiva.com/46411/1857382-46411531.pdf?src-supplier=Element14, ComponentLink5URL=https://datasheet.ciiva.com/46411/1857382-46411531.pdf?src-supplier=Element14, ComponentLink6Description=https://datasheet.ciiva.com/1671/ts3a24159-1671343.pdf?src-supplier=Digikey, ComponentLink6URL=https://datasheet.ciiva.com/1671/ts3a24159-1671343.pdf?src-supplier=Digikey, ComponentLink7Description=https://datasheet.ciiva.com/1671/ts3a24159-1671345.pdf?src-supplier=Digikey, ComponentLink7URL=https://datasheet.ciiva.com/1671/ts3a24159-1671345.pdf?src-supplier=Digikey, Height - Seated (Max)=1.1mm, JESD-30 Code=S-PDSO-G10, JESD-609 Code=e4, Length=3mm, Manufacturer Part Number=TS3A24159DGSR, Moisture Sensitivity Level=1, Number of Channels=2, Number of Functions=2, Number of Pins=10, Off-state Isolation-Nom=73dB, Pricing 1="1=1.3, 10=1.159, 25=1.1, 100=0.9036, 250=0.84472, 500=0.7465, 1000=0.58934 (USD)", Qualification Status="Not Qualified", Reach SVHC Compliant=Yes, RoHS=Yes, RoHS Compliant=Yes, Stock 1=16494, Supplier 1=Digikey, Surface Mount=Yes, Switch-off Time-Max=35ns, Switch-on Time-Max=75ns, Switching=BREAK-BEFORE-MAKEV, Terminal Finish=Nickel, Terminal Form="Gull Wing", Terminal Pitch=0.5mm, Terminal Position=DUAL, Width=3mm
U2 U8 U12 U13: library part TPS22942DCKR, "5.5-V, 0.1-A, 500-mΩ, load switch with current limit and active low enable 5-SC70 -40 to 85", Case/Package=SC, Manufacturer="Texas Instruments", Max Input Voltage=5.5V, Max Operating Temperature=85°C, Max Output Current=100mA, Max Power Dissipation=1.22mW, Max Supply Current=80uA, Min Input Voltage=1.62V, Min Operating Temperature=-40°C, Nominal Supply Current=1uA, On-State Resistance=500mR, Output Current=200mA, Package Quantity=3000, Quiescent Current=40uA, Category="Hot Swap Controllers", ComponentLink1Description=https://datasheet.ciiva.com/1962/tps22945-1962436.pdf?src-supplier=Digi-Key, ComponentLink1URL=https://datasheet.ciiva.com/1962/tps22945-1962436.pdf?src-supplier=Digi-Key, ComponentLink2Description=https://datasheet.ciiva.com/15103/getdatasheetpartid-122296-15103873.pdf?src-supplier=Verical, ComponentLink2URL=https://datasheet.ciiva.com/15103/getdatasheetpartid-122296-15103873.pdf?src-supplier=Verical, ComponentLink3Description=https://datasheet.ciiva.com/1512/1840307-1512708.pdf?src-supplier=Element14, ComponentLink3URL=https://datasheet.ciiva.com/1512/1840307-1512708.pdf?src-supplier=Element14, ComponentLink4Description=https://datasheet.ciiva.com/1963/tps22942-1963503.pdf?src-supplier=Digi-Key, ComponentLink4URL=https://datasheet.ciiva.com/1963/tps22942-1963503.pdf?src-supplier=Digi-Key, ComponentLink5Description=https://datasheet.ciiva.com/1963/tps22942-1963502.pdf?src-supplier=Digi-Key, ComponentLink5URL=https://datasheet.ciiva.com/1963/tps22942-1963502.pdf?src-supplier=Digi-Key, ComponentLink6Description=https://datasheet.ciiva.com/3233/tps22945-3233582.pdf?src-supplier=Avnet, ComponentLink6URL=https://datasheet.ciiva.com/3233/tps22945-3233582.pdf?src-supplier=Avnet, ComponentLink7Description=https://datasheet.ciiva.com/26074/tps22945-26074375.pdf?src-supplier=Avnet+Europe, ComponentLink7URL=https://datasheet.ciiva.com/26074/tps22945-26074375.pdf?src-supplier=Avnet+Europe, Fault Protection="Over Temperature", Interface=On/Off, Lead Free="Lead Free", Manufacturer Part Number=TPS22942DCKR, Max Supply Voltage=5.5V, Min Current Limit=100mA, Min Supply Voltage=1.62V, Number of Channels=1, Number of Inputs=1, Number of Outputs=1, Number of Pins=5, Output Configuration="High Side", Packaging="Tape and Reel", Pricing 1="1=1.24000, 10=1.10700, 25=1.05080, 100=0.86310, 250=0.80676, 500=0.71296, 1000=0.61950 (USD)", Radiation Hardening=No, REACH SVHC="No SVHC", RoHS=Yes, RoHS Compliant=Yes, Stock 1=1111, Supplier 1=Digi-Key, Termination=SMD/SMT, Turn-Off Delay Time=30us, Turn-On Delay Time=60us, Weight=8.8E-05oz
U3: library part EFR32BG13P732F512GM48-D, "Blue Gecko QFN48 2.4 G 19 dB BLE/Proprietary 512 kB 64 kB(RAM) 31GPIO", Manufacturer="Silicon Labs", Category="RF Receivers, Transceivers", ComponentLink1Description=http://www.farnell.com/datasheets/2813683.pdf?src-supplier=Farnell, ComponentLink1URL=http://www.farnell.com/datasheets/2813683.pdf?src-supplier=Farnell, Manufacturer Part Number=EFR32BG13P732F512GM48-D, Pricing 1="1=8.42000, 10=7.72000, 25=7.01800, 80=6.31625, 230=5.78987, 440=5.26350, 945=4.78499 (USD)", RoHS=Yes, Supplier 1=Digi-Key
U4 U5: library part SP1003-01DTG, "TVS DIODE 5VWM 12VC SOD723", Breakdown Voltage=5V, Capacitance=30pF, Clamping Voltage=12V, Clamping Voltage-Max=12.5V, Leakage Current=100nA, Manufacturer=Littelfuse, Max Operating Temperature=85°C, Max Surge Current=7A, Min Breakdown Voltage=6V, Min Operating Temperature=-40°C, Package Quantity=8000, Power Line Protection=No, Resistor Type=Zener, Test Current=1mA, Category="TVS Diodes", ComponentLink1Description=https://datasheet.ciiva.com/8062/littelfuse-spa-sp1003-series-8062432.pdf?src-supplier=Element14, ComponentLink1URL=https://datasheet.ciiva.com/8062/littelfuse-spa-sp1003-series-8062432.pdf?src-supplier=Element14, ComponentLink2Description=https://datasheet.ciiva.com/5771/littelfuse-spa-sp1003-series-5771141.pdf?src-supplier=Farnell, ComponentLink2URL=https://datasheet.ciiva.com/5771/littelfuse-spa-sp1003-series-5771141.pdf?src-supplier=Farnell, ComponentLink3Description=https://datasheet.ciiva.com/330/littelfuse-tvs-diode-array-sp1003-datasheet-pdf-330692.pdf?src-supplier=Digi-Key, ComponentLink3URL=https://datasheet.ciiva.com/330/littelfuse-tvs-diode-array-sp1003-datasheet-pdf-330692.pdf?src-supplier=Digi-Key, ComponentLink4Description=https://datasheet.ciiva.com/330/littelfuse-tvs-diode-array-sp1003-datasheet-pdf-330693.pdf?src-supplier=Digi-Key, ComponentLink4URL=https://datasheet.ciiva.com/330/littelfuse-tvs-diode-array-sp1003-datasheet-pdf-330693.pdf?src-supplier=Digi-Key, ComponentLink5Description=https://datasheet.ciiva.com/330/littelfuse-tvs-diode-array-sp1003-datasheet-pdf-330691.pdf?src-supplier=Digi-Key, ComponentLink5URL=https://datasheet.ciiva.com/330/littelfuse-tvs-diode-array-sp1003-datasheet-pdf-330691.pdf?src-supplier=Digi-Key, ComponentLink6Description=https://datasheet.ciiva.com/16216/littelfuse-spa-sp1003-series-16216345.pdf?src-supplier=Future+Electronics, ComponentLink6URL=https://datasheet.ciiva.com/16216/littelfuse-spa-sp1003-series-16216345.pdf?src-supplier=Future+Electronics, Diode Type=ZENER, Direction=Unidirectional, Lead Free="Lead Free", Manufacturer Part Number=SP1003-01DTG, Mount="Surface Mount", Number of Channels=1, Number of Elements=1, Number of Pins=2, Number of Unidirectional Channels=1, Operating Supply Voltage=5V, Packaging="Tape and Reel", Peak Pulse Current=7A, Polarity=Bidirectional,Unidirectional, Pricing 1="1=0.57000, 10=0.46200, 100=0.31430, 500=0.23576, 1000=0.17681, 2000=0.16208 (USD)", REACH SVHC="No SVHC", Reverse Breakdown Voltage=6V, Reverse Standoff Voltage=5V, RoHS=Yes, RoHS Compliant=Yes, Series="SP1003, SPA®", Stock 1=163275, Supplier 1=Digi-Key, Termination=SMD/SMT